# Altium PCB 叠层.PcbDoc
Units mm, origin at the board's own origin, x right, y up, seen from the top; angles counter-clockwise.
Board outline 369.06 x 145.23 mm, 2 copper layers (Top Layer, Bottom Layer); 1 components, 0 nets, 10 pads, 0 vias.
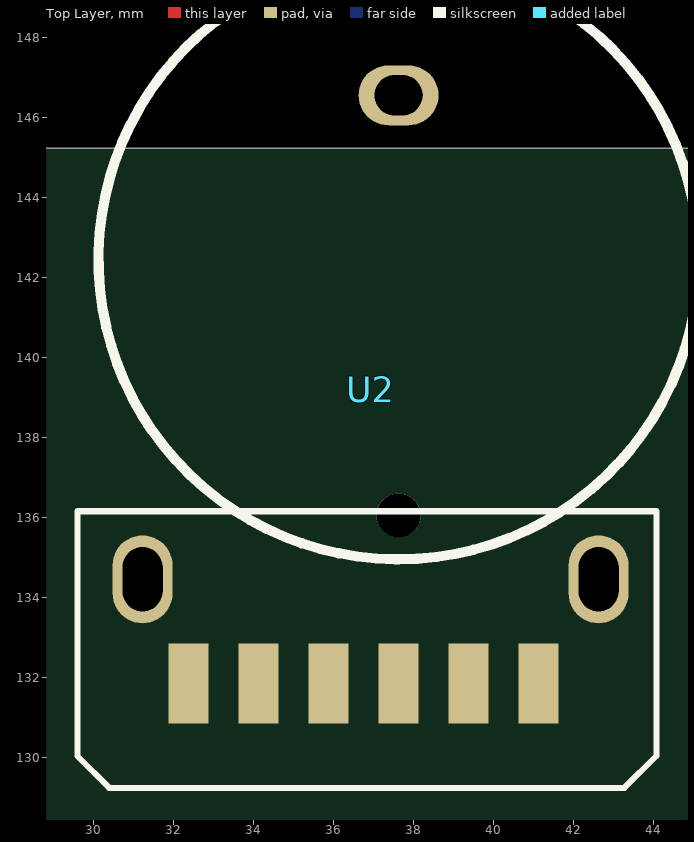
[diagram p0: Top Layer view]
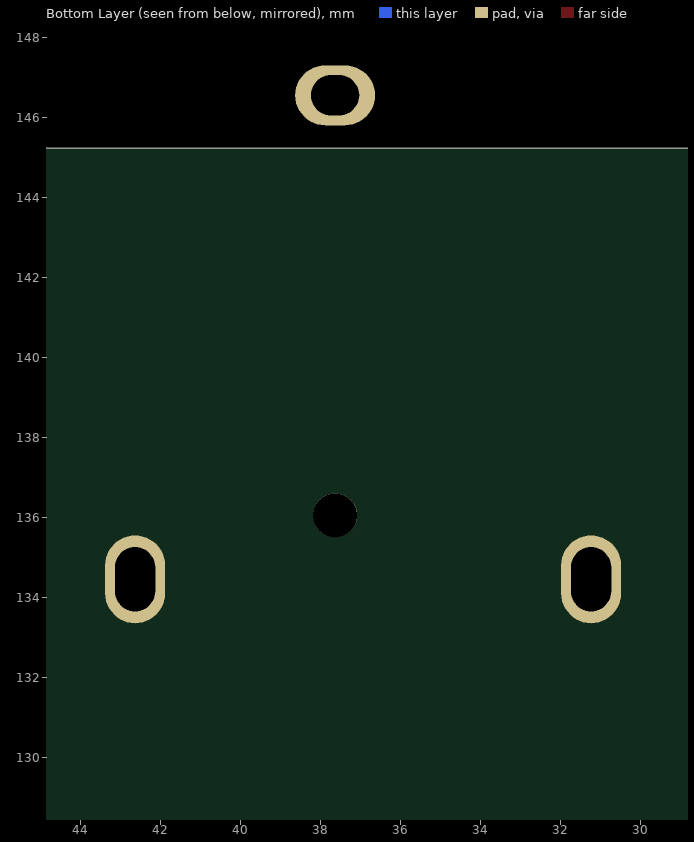
[diagram p1: Bottom Layer view, seen from below]

## Layer stack, top to bottom
Top Solder: solder mask 0.0102, Solder Resist, Dk 3.5
Top Layer: signal copper 0.0356
Dielectric 1: dielectric 0.32, FR-4, Dk 4.8
Bottom Layer: signal copper 0.0356
Bottom Solder: solder mask 0.0102, Solder Resist, Dk 3.5

## Board outline
0,2 ccw(c2,2) 2,0 367.063,0 ccw(c367.063,2) 369.063,2 369.063,143.225 ccw(c367.063,143.225) 367.063,145.225 2,145.225 ccw(c2,143.225) 0,143.225

## Design rules (kind name [scope] priority, off if disabled: settings)
Clearance [All] p1: gap=0.254 ignorepadtopadclearanceinfootprint=FALSE except(0: Arc-Hole Track-Hole SMDPad-Hole THPad-Hole Via-Hole Fill-Hole Poly-Hole Region-Hole Text-Hole)
PolygonConnect [All] p1: connectstyle=Relief reliefconductorwidth=0.254 reliefentries=4 polygonreliefangle="90 Angle" airgapwidth=0.254
RoutingVias [All] p1: holewidth=0.711 width=1.27 viastyle="Through Hole" minholewidth=0.711 minwidth=1.27 maxholewidth=0.711 maxwidth=1.27
SolderMaskExpansion [All] p1: expansion=0.102 istentingtop=FALSE
Width [All] p1: maxlimit=0.254 minlimit=0.254 preferedwidth=0.254
30 further rules are at their usual default settings.

## Components (designator, comment, footprint, x,y, rotation, side; value= is the part's Value field where it differs from the comment)
U2 "EVQW2001" EVQWK2001 37.624,132.249 r270 top

## Footprints (in the part's own frame and the unit in brackets; to place one, negate y for a bottom-side part, rotate by r counter-clockwise, add the part's x,y. Pads: shape width x height; smd on the part's side, far side on the other; paste and mask are expansions set on the pad)
EVQWK2001 [mm]
  rect 2x1 smd: 1(0.4,3.5) 2(0.4,1.75) 3(0.4,0) 4(0.4,-1.75) 5(0.4,-3.5) 6(0.4,-5.25)
  oval 1.5x2 hole 1 slot 1.2 at 90 deg: 7(-14.3,0)
  oval 2.2x1.5 hole 1 slot 1.6 at 0 deg: 8(-2.2,-6.4) 8(-2.2,5)
  round 1.1 hole 1.1 unplated: ""(-3.8,0)
  silkscreen extent -17.7,-8.03 3.01,7.5, body extent -17.73,-7.4 0.36,7.6, height 5.4

## Part data
U2: Contributor=jam_dan, spicePre=U, spiceSymbolName=EVQW2001

## Nets (pads, with @x,y where several pads share a name; then routed paths per layer and width w, separated by ;. In a path a pad name is that pad's centre, name@x,y a point inside that pad or via, vN(x,y) a via of type N, cw(c..) or ccw(c..) an arc to the next point about the centre after c; other vN are vias at no path point)
pads on no net: U2. U2.1 U2.2 U2.3 U2.4 U2.5 U2.6 U2.7 U2.8

## Silkscreen, mask and mechanical layers (free items; w line width, h text height)
Mechanical 1:
  circle w0.013: c104.531,140.225 r1.6
  circle w0.013: c184.531,140.225 r1.6
  circle w0.013: c264.531,140.225 r1.6
  circle w0.013: c264.531,5 r1.6
  circle w0.013: c184.531,5 r1.6
  circle w0.013: c104.531,5 r1.6
  circle w0.013: c364.063,72.613 r1.6
  circle w0.013: c5,72.613 r1.6
  circle w0.013: c5,140.225 r1.6
  circle w0.013: c364.063,140.225 r1.6
  circle w0.013: c364.063,5 r1.6
  circle w0.013: c5,5 r1.6
  lines w0.013: 0,2 ccw(c2,2) 2,0 367.063,0 ccw(c367.063,2) 369.063,2 369.063,143.225 ccw(c367.063,143.225) 367.063,145.225 46.926,145.225 46.736,145.225 46.736,134.725 57.331,134.725 ccw(c57.331,137.725) 60.331,137.725 cw(c64.531,137.725) 68.731,137.725 ccw(c71.731,137.725) 71.731,134.725 137.331,134.725 ccw(c137.331,137.725) 140.331,137.725 cw(c144.531,137.725) 148.731,137.725 ccw(c151.731,137.725) 151.731,134.725 217.331,134.725 ccw(c217.331,137.725) 220.331,137.725 cw(c224.531,137.725) 228.731,137.725 ccw(c231.731,137.725) 231.731,134.725 297.331,134.725 ccw(c297.331,137.725) 300.331,137.725 cw(c304.531,137.725) 308.731,137.725 ccw(c311.731,137.725) 311.731,134.725 358.563,134.725 358.563,114.813 ccw(c361.563,114.813) 361.563,111.813 cw(c361.563,107.613) 361.563,103.413 ccw(c361.563,100.413) 358.563,100.413 358.563,49.813 ccw(c361.563,49.813) 361.563,46.813 cw(c361.563,42.613) 361.563,38.413 ccw(c361.563,35.413) 358.563,35.413 358.563,10.5 311.731,10.5 ccw(c311.731,7.5) 308.731,7.5 cw(c304.531,7.5) 300.331,7.5 ccw(c297.331,7.5) 297.331,10.5 231.731,10.5 ccw(c231.731,7.5) 228.731,7.5 cw(c224.531,7.5) 220.331,7.5 ccw(c217.331,7.5) 217.331,10.5 151.731,10.5 ccw(c151.731,7.5) 148.731,7.5 cw(c144.531,7.5) 140.331,7.5 ccw(c137.331,7.5) 137.331,10.5 71.731,10.5 ccw(c71.731,7.5) 68.731,7.5 cw(c64.531,7.5) 60.331,7.5 ccw(c57.331,7.5) 57.331,10.5 10.5,10.5 10.5,35.413 ccw(c7.5,35.413) 7.5,38.413 cw(c7.5,42.613) 7.5,46.813 ccw(c7.5,49.813) 10.5,49.813 10.5,100.413 ccw(c7.5,100.413) 7.5,103.413 cw(c7.5,107.613) 7.5,111.813 ccw(c7.5,114.813) 10.5,114.813 10.5,134.725 28.702,134.725 28.702,136.398 28.702,145.225 2,145.225 ccw(c2,143.225) 0,143.225 0,2